# Altium PCB 2_RPi.PcbDoc (part 1 of 2)
Units mm, origin at the board's own origin, x right, y up, seen from the top; angles counter-clockwise.
Board outline 85.1 x 56 mm, 4 copper layers (Top Copper, Signal Layer 1, Signal Layer 2, Bottom Copper), stack 1.572 mm thick; 87 components, 122 nets, 420 pads, 307 vias.
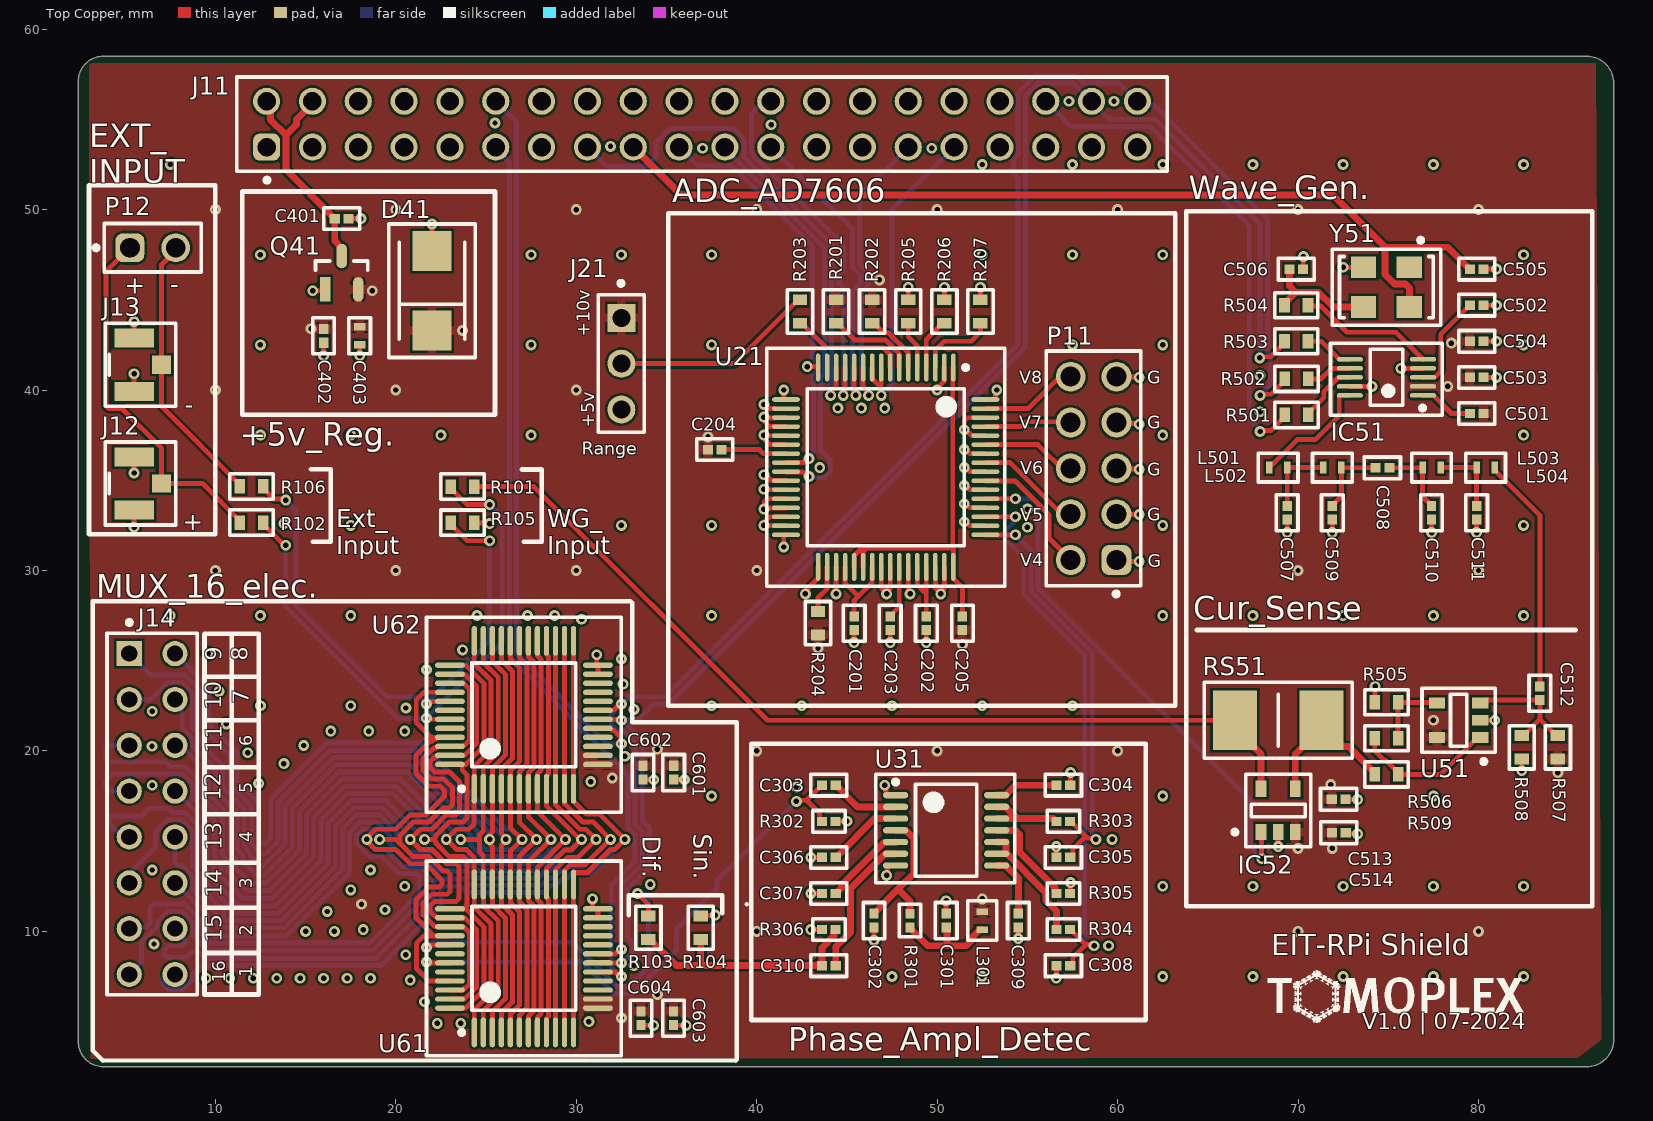
[diagram p0: Top Copper view]
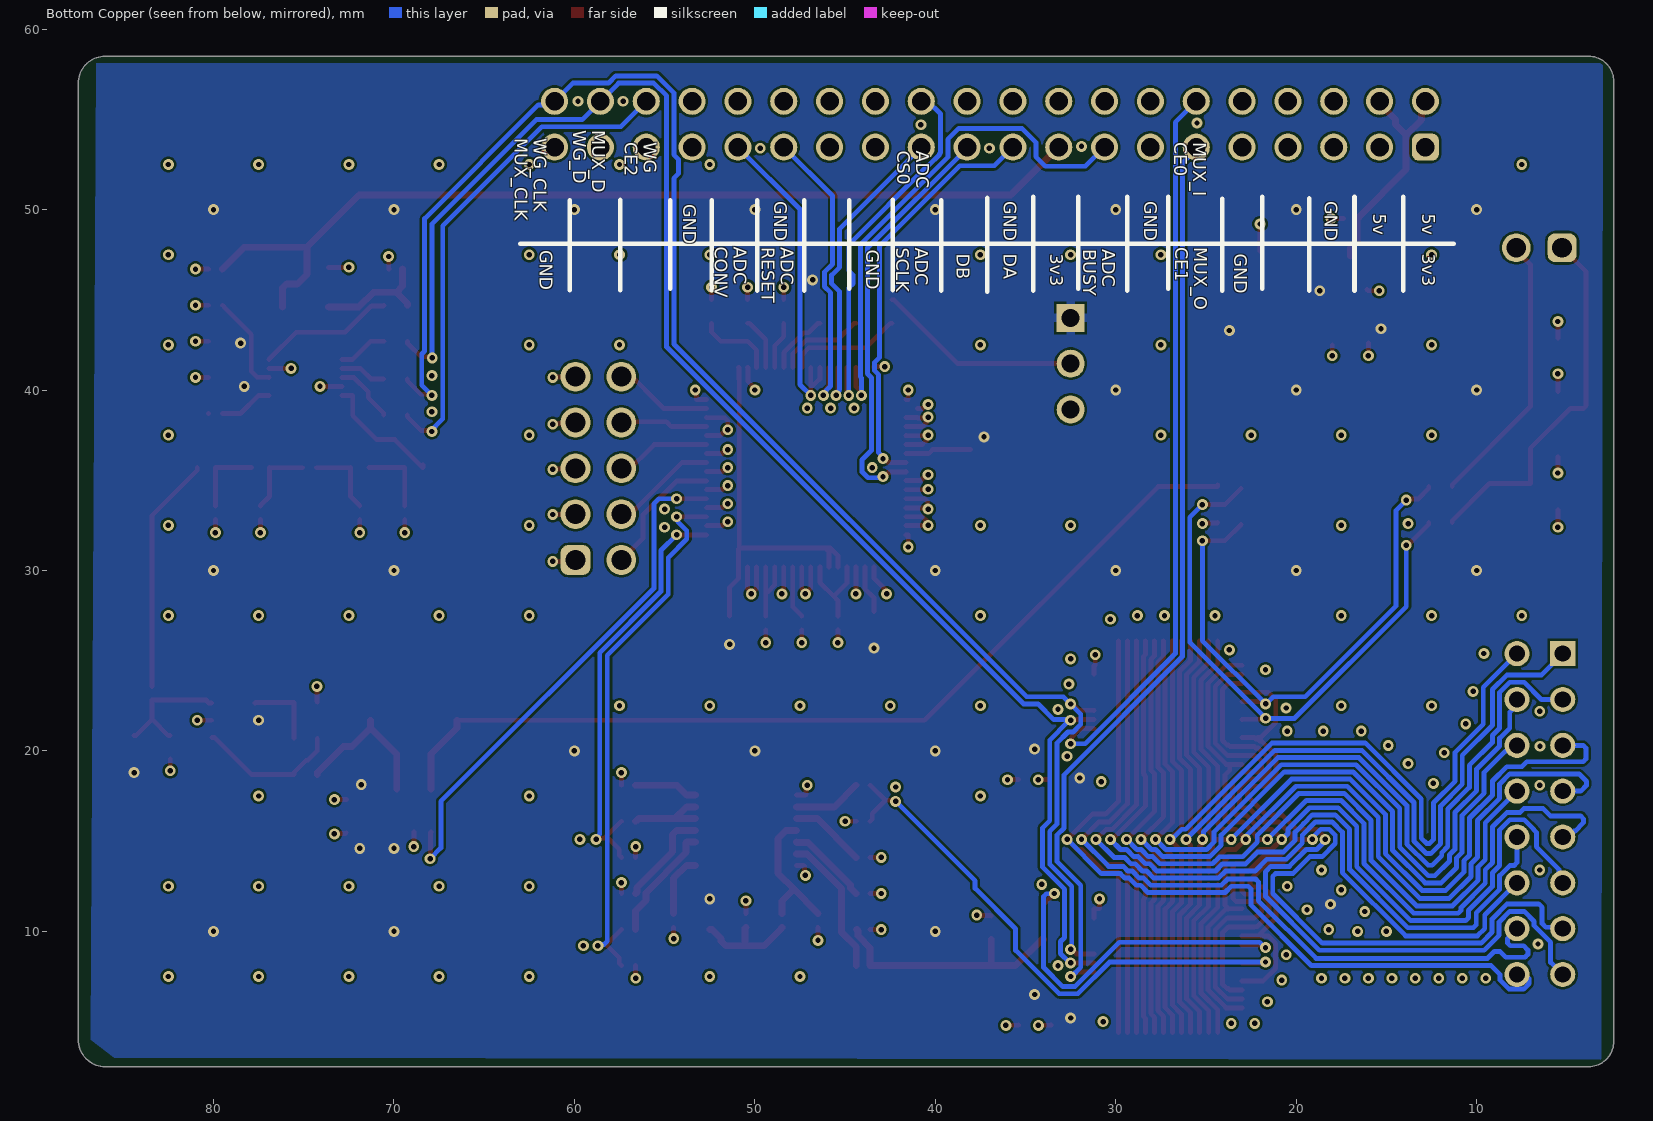
[diagram p1: Bottom Copper view, seen from below]
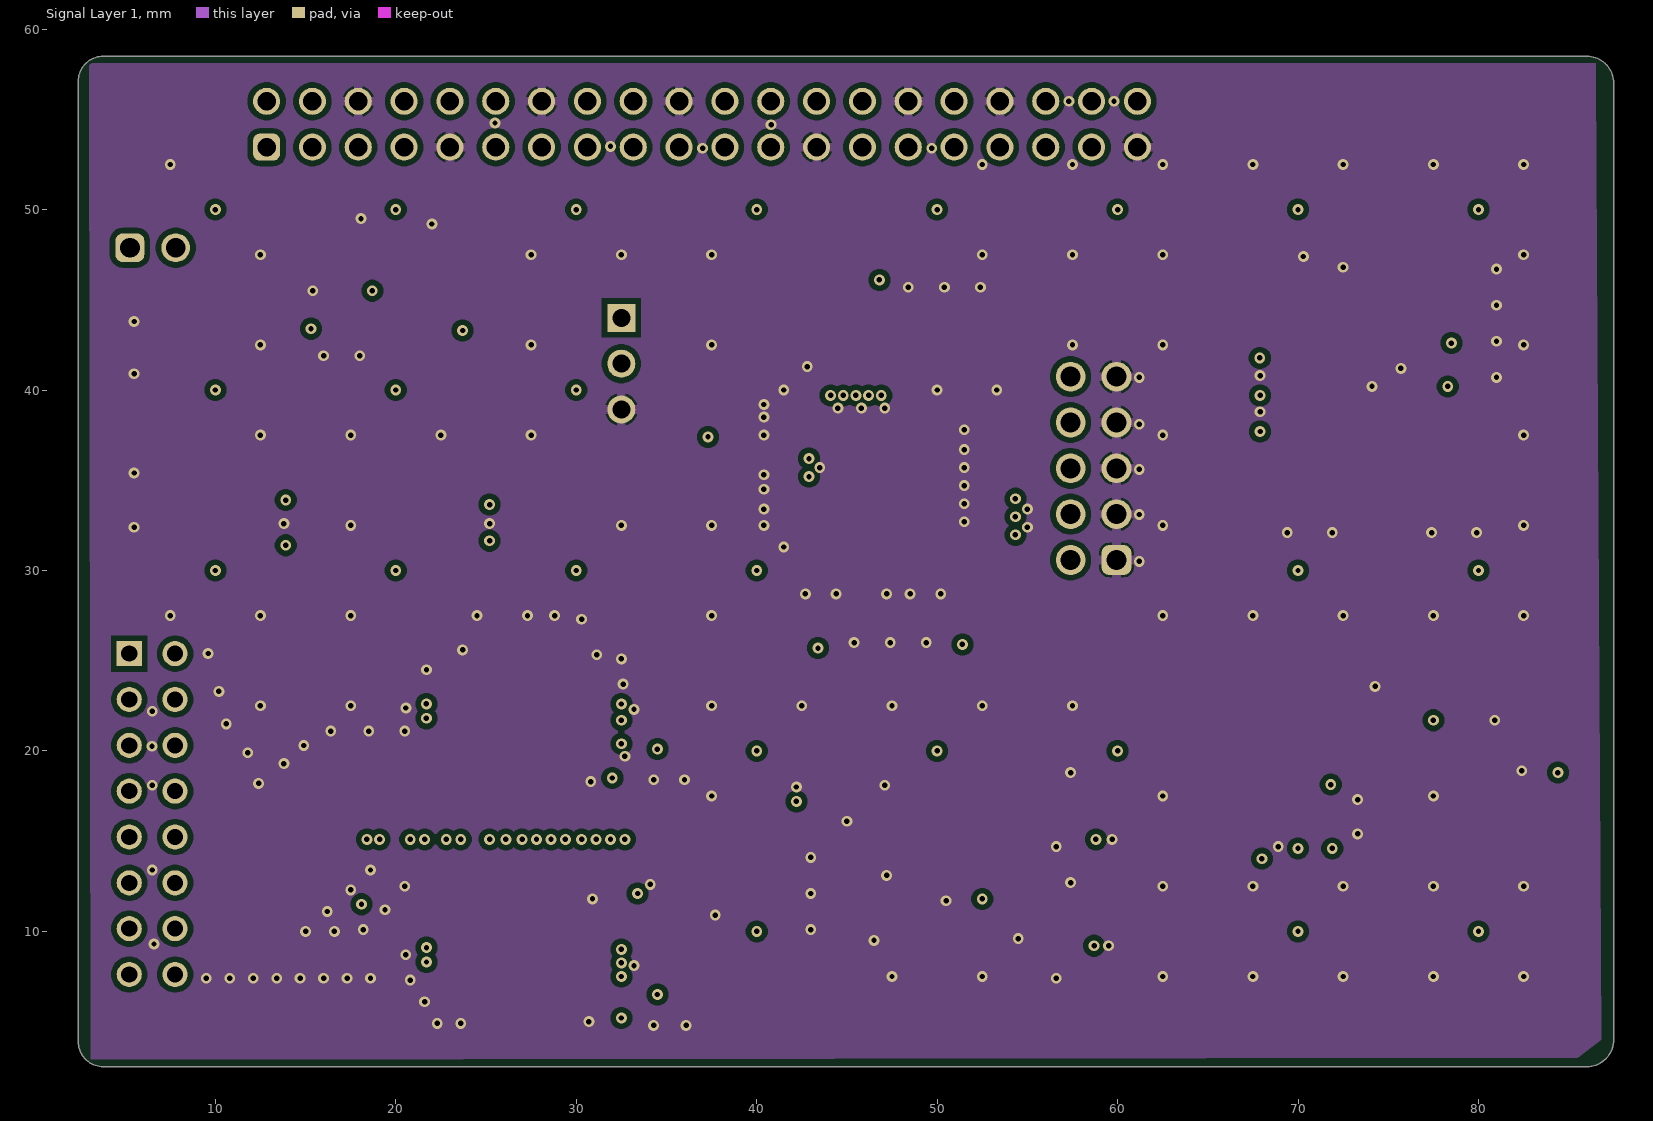
[diagram p2: Signal Layer 1]
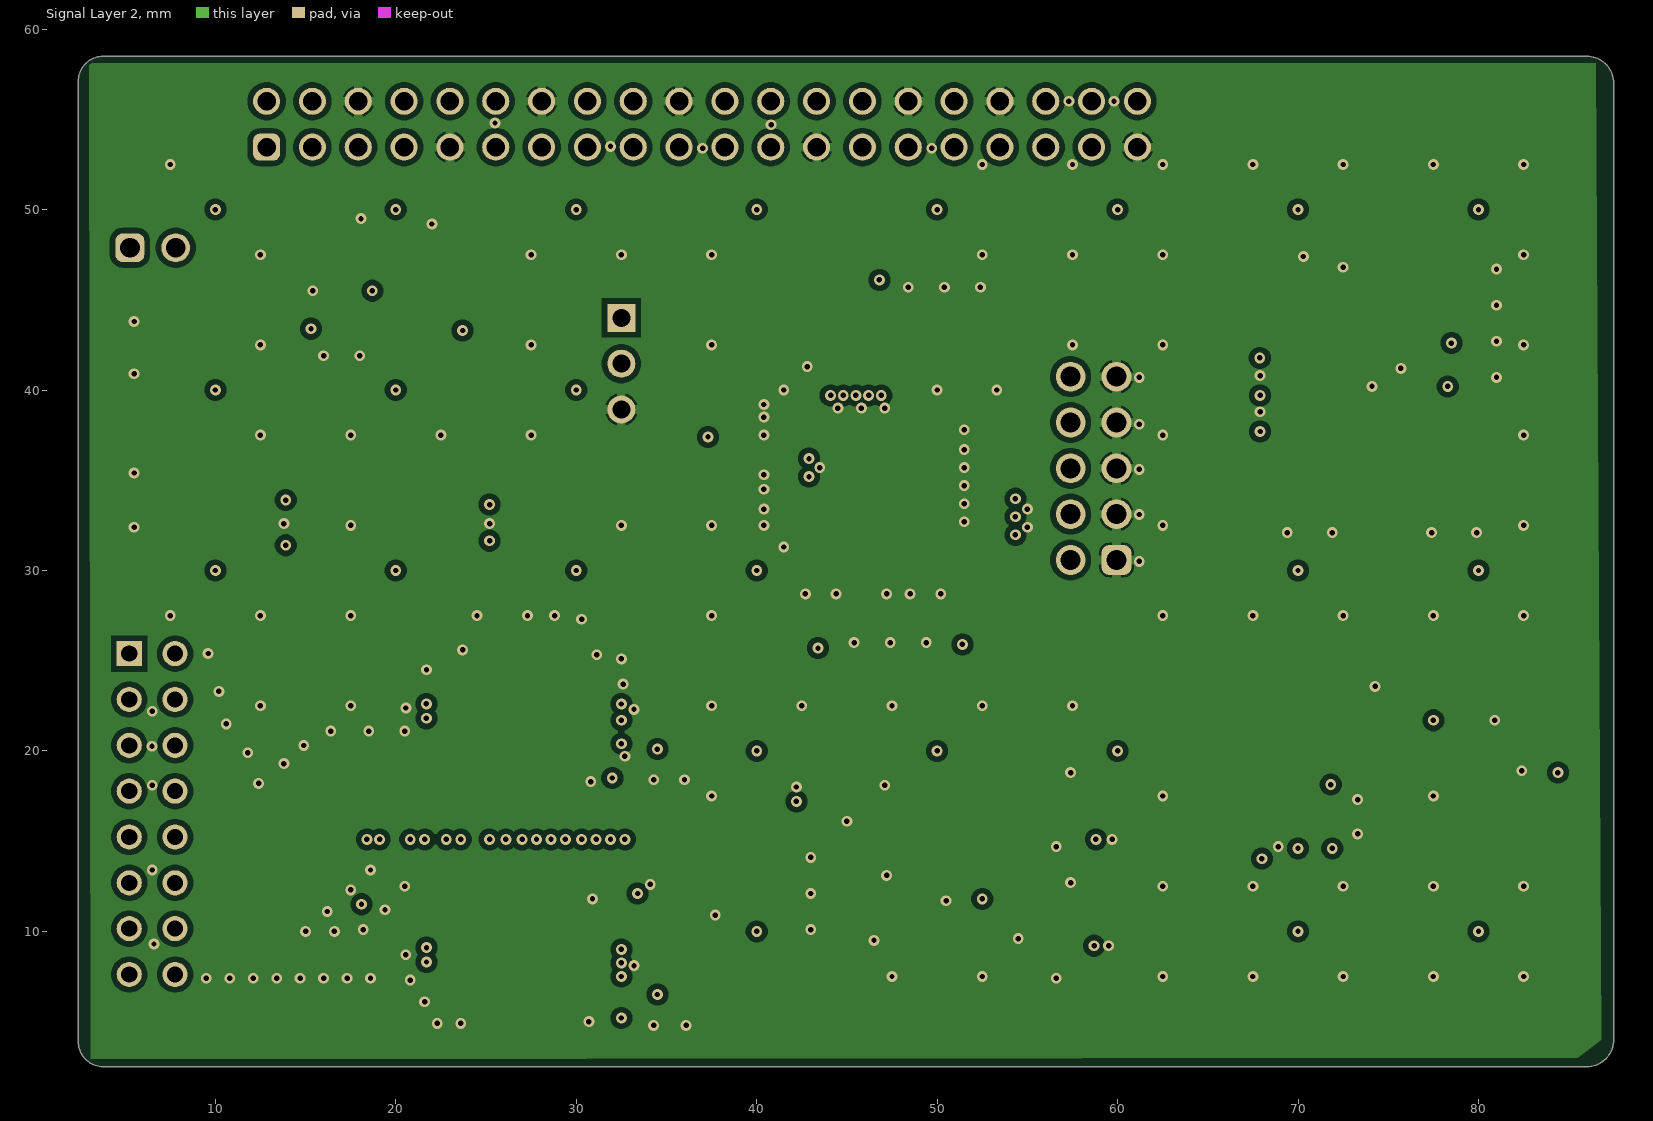
[diagram p3: Signal Layer 2]

## Layer stack, top to bottom
Top Solder: solder mask 0.015, Solder Resist, Dk 3.8
Top Copper: signal copper 0.035
Dielectric 1: prepreg 0.2, 7628, Dk 4.6
Signal Layer 1: signal copper 0.0175
Core: core 1.0668, FR-4, Dk 4.5
Signal Layer 2: signal copper 0.0175
Dielectric 3: prepreg 0.2, 7628, Dk 4.6
Bottom Copper: signal copper 0.035
Bottom Solder: solder mask 0.015, Solder Resist, Dk 3.8

## Board outline
3.8,2.5 cw(c3.8,3.9) 2.4,3.9 2.4,57.1 cw(c3.8,57.1) 3.8,58.5 86,58.5 cw(c86,57) 87.5,57 87.5,4 cw(c86,4) 86,2.5

## Design rules (kind name [scope] priority, off if disabled: settings)
BoardOutlineClearance [All] p1: gap=0.2 ignorepadtopadclearanceinfootprint=FALSE except(0.4: Arc-SplitBarrior Arc-SplitContinuation Track-SplitBarrior Track-SplitContinuation SMDPad-SplitBarrior SMDPad-SplitContinuation THPad-SplitBarrior THPad-SplitContinuation Via-SplitBarrior Via-SplitContinuation Fill-SplitBarrior Fill-SplitContinuation Poly-SplitBarrior Poly-SplitContinuation Region-SplitBarrior Region-SplitContinuation Text-SplitBarrior Text-SplitContinuation)
Clearance "Clearance Bottom Layer" [OnLayer('Bottom Copper')] p1: gap=0.127 ignorepadtopadclearanceinfootprint=TRUE
Clearance "Clearance Signal Layer 2" [OnLayer('Signal Layer 2')] p2: gap=0.3 ignorepadtopadclearanceinfootprint=TRUE
Clearance "Clearance Signal Layer 1" [OnLayer('Signal Layer 1')] p3: gap=0.3 ignorepadtopadclearanceinfootprint=TRUE
Clearance "Clearance Top Layer_1" [OnLayer('Top Copper')] p4: gap=0.127 ignorepadtopadclearanceinfootprint=TRUE
HoleSize [All] p1: absolutevalues=TRUE maxlimit=6.3 minlimit=0.2 maxpercent=80.000 minpercent=20.000
MatchedLengths [InNetClass('Electrodes')] p1: tolerance=2 checknetsindiffpair=FALSE checkdiffpairvsdiffpair=TRUE checkxsignals=TRUE checkothers=TRUE
MinimumAnnularRing [All] p1: minimumring=0.076
MinimumSolderMaskSliver [All] p1: minsoldermaskwidth=0.1
PolygonConnect PolygonConnect_1 [All] p1: thpad.connectstyle=Relief thpad.reliefconductorwidth=0.508 thpad.reliefentries=4 thpad.polygonreliefangle="90 Angle" thpad.airgapwidth=0.127 smdpad.connectstyle=Relief smdpad.reliefconductorwidth=0.508 smdpad.reliefentries=4 smdpad.polygonreliefangle="90 Angle" smdpad.airgapwidth=0.127 via.connectstyle=Direct via.reliefconductorwidth=0.508 via.reliefentries=4 via.polygonreliefangle="90 Angle" via.airgapwidth=0.254
RoutingCorners [All] p1: cornerstyle=Round minsetback=2.54 maxsetback=2.54
RoutingVias [All] p1: holewidth=0.5 width=1 viastyle="Through Hole" minholewidth=0.2 minwidth=0.45 maxholewidth=1 maxwidth=2
SilkToSilkClearance [All] p1: silktosilkclearance=0.1
SilkToSolderMaskClearance [IsPad] p1: minsilkscreentomaskgap=0.1 clearancetoexposedcopper=TRUE
SolderMaskExpansion [All] p1: expansion=0.05 istentingtop=FALSE
SupplyNets "Schematic Supply Nets_5" [InNet('GND')] p1: voltage=0.000
SupplyNets "Schematic Supply Nets_4" [InNet('VDD')] p2: voltage=0.000
SupplyNets "Schematic Supply Nets_1" [InNet('5V')] p3: voltage=0.000
SupplyNets "Schematic Supply Nets" [InNet('3V3')] p4: voltage=0.000
Width [All] p1: maxlimit=2.54 minlimit=0.089 preferedwidth=0.381
25 further rules are at their usual default settings.

## Classes and differential pairs
net class Electrodes: S1 S2 S3 S4 S5 S6 S7 S8 S9 S10 S11 S12 S13 S14 S15 S16
component class U_6_MUX: C601 C602 C603 C604 U61 U62
component class U_5_WG: C501 C502 C503 C504 C505 C506 C507 C508 C509 C510 C511 C512 C513 C514 IC51 IC52 L501 L502 L503 L504 R501 R502 R503 R504 R505 R506 R507 R508 R509 RS51 U51 Y51
component class U_4_Supply: C401 C402 C403 D41 IC41 Q41
component class U_3_Phase_Amp: C301 C302 C303 C304 C305 C306 C307 C308 C309 C310 L301 R301 R302 R303 R304 R305 R306 U31
component class U_2_ADC: C101 C102 C103 C104 C105 C201 C202 C203 C204 C205 J21 R201 R202 R203 R204 R205 R206 R207 U21
component class 1_RPi: J11 J12 J13 J14 P11 P12 R101 R102 R103 R104 R105 R106 U-FL21 U-FL22

## Components (designator, comment, footprint, x,y, rotation, side; value= is the part's Value field where it differs from the comment)
C201 "generic" CAPC1005X55X30LL05T10 45.4,27.08 r90 top value=1uF
C202 "generic" CAPC1005X55X30LL05T10 49.4,27.08 r90 top value=10uF
C203 "generic" CAPC1005X55X30LL05T10 47.4,27.08 r90 top value=10uF
C204 "generic" CAPC1005X55X30LL05T10 37.68,36.7 r180 top value=100nF
C205 "generic" CAPC1005X55X30LL05T10 51.4,27.08 r270 top value=100nF
C301 "generic" CAPC1005X55X30LL05T10 50.5,10.6 r270 top value=100nF
C302 "generic" CAPC1005X55X30LL05T10 46.5,10.6 r90 top value=100pF
C303 "generic" CAPC1005X55X30LL05T10 44,18.1 r0 top value=1nF
C304 "generic" CAPC1005X55X30LL05T10 57,18.1 r180 top value=1uF
C305 "generic" CAPC1005X55X30LL05T10 57,14.1 r0 top value=1uF
C306 "generic" CAPC1005X55X30LL05T10 44,14.1 r180 top value=1nF
C307 "generic" CAPC1005X55X30LL05T10 44,12.1 r180 top value=1nF
C308 "generic" CAPC1005X55X30LL05T10 57,8.1 r0 top value=1uF
C309 "generic" CAPC1005X55X30LL05T10 54.5,10.6 r90 top value=1uF
C310 "generic" CAPC1005X55X30LL05T10 44,8.1 r180 top value=1nF
C401 "generic" CAPC1005X55X30LL05T10 17,49.5 r0 top value=100nF
C402 "generic" CAPC1005X55X30LL05T10 16,43 r270 top value=1uF
C403 "TACK106M002QTA" CAPC1005X70X10LL20T00 18,43 r90 top value=10uF
C501 "generic" CAPC1005X55X30LL05T10 79.9,38.7 r180 top value=10nF
C502 "generic" CAPC1005X55X30LL05T10 79.9,44.7 r180 top value=100nF
C503 "generic" CAPC1005X55X30LL05T10 79.9,40.7 r180 top value=10uF
C504 "generic" CAPC1005X55X30LL05T10 79.9,42.7 r180 top value=100nF
C505 "generic" CAPC1005X55X30LL05T10 79.9,46.7 r180 top value=100nF
C506 "generic" CAPC1005X55X30LL05T10 69.9,46.7 r180 top value=15pF
C507 "generic" CAPC1005X55X30LL05T10 69.4,33.2 r270 top value=330pF
C508 "generic" CAPC1005X55X30LL05T10 74.681,35.691 r180 top value=1.5uF
C509 "generic" CAPC1005X55X30LL05T10 71.9,33.2 r270 top value=270pF
C510 "generic" CAPC1005X55X30LL05T10 77.4,33.2 r90 top value=270pF
C511 "generic" CAPC1005X55X30LL05T10 79.9,33.2 r270 top value=330pF
C512 "generic" CAPC1005X55X30LL05T10 83.4,23.2 r90 top value=2.2uF
C513 "generic" CAPC1005X55X30LL05T10 72.248,17.322 r0 top value=100nF
C514 "generic" CAPC1005X55X30LL05T10 72.265,15.465 r0 top value=1uF
C601 "generic" CAPC1005X55X30LL05T10 35.4,18.8 r270 top value=100nF
C602 "generic" CAPC1005X55X30LL05T10 33.7,18.8 r90 top value=10uF
C603 "generic" CAPC1005X55X30LL05T10 35.39,5.19 r270 top value=100nF
C604 "generic" CAPC1005X55X30LL05T10 33.59,5.19 r90 top value=10uF
D41 "SMBJ6.0A-13-F" SMBJ12A 22,45.5 r90 top
IC51 "AD9833WBRMZ-REEL" ADI-RM-10_L 74.9,40.7 r180 top
IC52 "MAX4376TAUK+T" MAXM-U5+2_L 68.9,16.7 r90 top
J11 "61304021821" 61304021821 36.97,54.73 r0 top
J12 "U.FL-R-SMT(10)" FP-U_FL-R-SMT_10-MFG 5.499,34.818 r270 top
J13 "U.FL-R-SMT(10)" FP-U_FL-R-SMT_10-MFG 5.5,41.4 r270 top
J14 "87227-8" FP-87227-8-MFG 6.5,16.5 r270 top
J21 "90120-0763" FP-90120-0763-MFG 32.5,41.46 r270 top
L301 "LQW18AN10NG00D" IND_0402HL-821XJRU 52.5,10.6 r90 top
L501 "LQW18AN10NG00D" IND_0402HL-821XJRU 68.9,35.7 r180 top
L502 "LQW18AN10NG00D" IND_0402HL-821XJRU 71.9,35.7 r0 top
L503 "LQW18AN10NG00D" IND_0402HL-821XJRU 77.4,35.7 r0 top
L504 "LQW18AN10NG00D" IND_0402HL-821XJRU 80.4,35.7 r0 top
P11 "61301021121" 61301021121 58.67,35.66 r90 top
P12 "61300211121" 61300211121 6.533,47.885 r0 top
Q41 "DMG2305UX-7" FP-SOT23-IPC_B 17,46.5 r90 top
R101 "RC0603JR-070RL" RESC1608X55X25LL10T15 23.7,34.65 r180 top
R102 "RC0603JR-070RL" RESC1608X55X25LL10T15 12.005,32.656 r0 top
R103 "RC0603JR-070RL" RESC1608X55X25LL10T15 34,10.2 r270 top
R104 "RC0603JR-070RL" RESC1608X55X25LL10T15 36.9,10.2 r90 top
R105 "RC0603JR-070RL" RESC1608X55X25LL10T15 23.7,32.65 r180 top
R106 "RC0603JR-070RL" RESC1608X55X25LL10T15 12.005,34.656 r0 top
R201 "RC0603JR-070RL" RESC1608X55X25LL10T15 44.4,44.35 r90 top
R202 "RC0603JR-070RL" RESC1608X55X25LL10T15 46.4,44.35 r90 top
R203 "RC0603JR-070RL" RESC1608X55X25LL10T15 42.4,44.35 r90 top
R204 "RC0603JR-070RL" RESC1608X55X25LL10T15 43.4,27.08 r90 top
R205 "RC0603JR-070RL" RESC1608X55X25LL10T15 48.4,44.35 r90 top
R206 "RC0603JR-070RL" RESC1608X55X25LL10T15 50.4,44.35 r90 top
R207 "RC0603JR-070RL" RESC1608X55X25LL10T15 52.4,44.35 r90 top
R301 "0" RESC1005X40X25LL10T10 48.5,10.6 r270 top
R302 "52.3" RESC1005X40X25LL10T10 44,16.1 r180 top
R303 "100" RESC1005X40X25LL10T10 57,16.1 r0 top
R304 "100" RESC1005X40X25LL10T10 57,10.1 r0 top
R305 "1K" RESC1005X40X25LL10T10 57,12.1 r180 top
R306 "52.3" RESC1005X40X25LL10T10 44,10.1 r180 top
R501 "RC0603JR-070RL" RESC1608X55X25LL10T15 69.917,38.618 r0 top
R502 "RC0603JR-070RL" RESC1608X55X25LL10T15 69.917,40.618 r0 top
R503 "RC0603JR-070RL" RESC1608X55X25LL10T15 69.9,42.7 r0 top
R504 "RC0603JR-070RL" RESC1608X55X25LL10T15 69.9,44.7 r0 top
R505 "RC0603JR-070RL" RESC1608X55X25LL10T15 74.9,22.7 r0 top
R506 "RC0603JR-070RL" RESC1608X55X25LL10T15 74.9,20.7 r180 top
R507 "RC0603JR-070RL" RESC1608X55X25LL10T15 84.4,20.2 r270 top
R508 "RC0603JR-070RL" RESC1608X55X25LL10T15 82.4,20.2 r90 top
R509 "RC0603JR-070RL" RESC1608X55X25LL10T15 74.9,18.7 r180 top
RS51 "10" RESC6331X80N 68.9,21.7 r180 top
U21 "AD7606BSTZ" ST-64-2_L 47.15,35.725 r270 top
U31 "AD8302ARUZ" ADI-RU-14_L 50.5,15.6 r0 top
U51 "AD8014ARTZ" ADI-RJ-5_L 78.9,21.7 r180 top
U61 "ADG725BSUZ" ADI-SU-48_N 27.1,8.5 r90 top
U62 "ADG725BSUZ" ADI-SU-48_N 27.1,22 r90 top
Y51 "ASFLMB-25.000MHZ-XY-T" FP-ASFL3-MFG 74.9,45.7 r180 top

## Footprints (in the part's own frame and the unit in brackets; to place one, negate y for a bottom-side part, rotate by r counter-clockwise, add the part's x,y. Pads: shape width x height; smd on the part's side, far side on the other; paste and mask are expansions set on the pad)
61300211121 [mm] "Pin Header, pitch 2.54 mm, THT, Vertical, single row, 2p"
  rrect50% 1.6x1.6 hole 1.1: 1(-1.27,0)
  round 1.6 hole 1.1: 2(1.27,0)
  silkscreen extent -3.26,-1.35 2.69,1.35, body extent -2.54,-1.27 2.54,1.27, height 8.57
61301021121 [mm] "Pin Header, pitch 2.54 mm, THT, Vertical, dual row, 10p"
  rrect50% 1.65x1.65 hole 1.1: 1(-5.08,-1.27)
  round 1.65 hole 1.1: 2(-5.08,1.27) 3(-2.54,-1.27) 4(-2.54,1.27) 5(0,-1.27) 6(0,1.27) 7(2.54,-1.27) 8(2.54,1.27) 9(5.08,-1.27) 10(5.08,1.27)
  silkscreen extent -7.08,-2.62 6.5,2.62, body extent -6.35,-2.54 6.35,2.54, height 8.59
61304021821 [mm] "Socket Header, Pitch 2.54 mm, THT, Vertical, dual row, 40p"
  rrect50% 1.5x1.5 hole 1.02: 1(-24.13,-1.27)
  round 1.5 hole 1.02: 2(-24.13,1.27) 3(-21.59,-1.27) 4(-21.59,1.27) 5(-19.05,-1.27) 6(-19.05,1.27) 7(-16.51,-1.27) 8(-16.51,1.27) 9(-13.97,-1.27) 10(-13.97,1.27) 11(-11.43,-1.27) 12(-11.43,1.27) 13(-8.89,-1.27) 14(-8.89,1.27) 15(-6.35,-1.27) 16(-6.35,1.27) 17(-3.81,-1.27) 18(-3.81,1.27) 19(-1.27,-1.27) 20(-1.27,1.27) 21(1.27,-1.27) 22(1.27,1.27) 23(3.81,-1.27) 24(3.81,1.27) 25(6.35,-1.27) 26(6.35,1.27) 27(8.89,-1.27) 28(8.89,1.27) 29(11.43,-1.27) 30(11.43,1.27) 31(13.97,-1.27) 32(13.97,1.27) 33(16.51,-1.27) 34(16.51,1.27) 35(19.05,-1.27) 36(19.05,1.27) 37(21.59,-1.27) 38(21.59,1.27) 39(24.13,-1.27) 40(24.13,1.27)
  silkscreen extent -25.78,-3.22 25.78,2.62, body extent -25.65,-2.54 25.65,2.54, height 8.45
ADI-RJ-5_L [mm] "SOT-23, 5-Leads, Body 2.9x1.6mm, Pitch 0.95mm, IPC High Density"
  rect 0.9x0.6 smd: 1(-1.2,0.95) 2(-1.2,0) 3(-1.2,-0.95) 4(1.2,-0.95) 5(1.2,0.95)
  silkscreen extent -2.03,-1.78 2.03,2.41, body extent -0.85,-1.5 0.85,1.5, height 1.45
ADI-RM-10_L [mm] "TSSOP, 10-Leads, Body 3x3mm, Pitch 0.5mm, IPC High Density"
  oval 1.45x0.25 smd: 1(-2.025,1) 2(-2.025,0.5) 3(-2.025,0) 4(-2.025,-0.5) 5(-2.025,-1) 6(2.025,-1) 7(2.025,-0.5) 8(2.025,0) 9(2.025,0.5) 10(2.025,1)
  silkscreen extent -3.1,-1.9 3.1,2.1, body extent -1.55,-1.55 1.55,1.55, height 1.1
ADI-RU-14_L [mm] "TSOP, 14-Leads, Body 5x4.4mm, Pitch 0.65mm, IPC High Density"
  oval 1.4x0.35 smd: 1(-2.8,1.95) 2(-2.8,1.3) 3(-2.8,0.65) 4(-2.8,0) 5(-2.8,-0.65) 6(-2.8,-1.3) 7(-2.8,-1.95) 8(2.8,-1.95) 9(2.8,-1.3) 10(2.8,-0.65) 11(2.8,0) 12(2.8,0.65) 13(2.8,1.3) 14(2.8,1.95)
  silkscreen extent -3.9,-2.9 3.8,3.1, body extent -2.25,-2.55 2.25,2.55, height 1.2
ADI-SU-48_N [mm] "QFP, 48-Leads, Body 7x7mm, Pitch 0.5mm, IPC Medium Density"
  oval 1.65x0.3 smd: 1(-4.1,2.75) 2(-4.1,2.25) 3(-4.1,1.75) 4(-4.1,1.25) 5(-4.1,0.75) 6(-4.1,0.25) 7(-4.1,-0.25) 8(-4.1,-0.75) 9(-4.1,-1.25) 10(-4.1,-1.75) 11(-4.1,-2.25) 12(-4.1,-2.75) 25(4.1,-2.75) 26(4.1,-2.25) 27(4.1,-1.75) 28(4.1,-1.25) 29(4.1,-0.75) 30(4.1,-0.25) 31(4.1,0.25) 32(4.1,0.75) 33(4.1,1.25) 34(4.1,1.75) 35(4.1,2.25) 36(4.1,2.75)
  oval 0.3x1.65 smd: 13(-2.75,-4.1) 14(-2.25,-4.1) 15(-1.75,-4.1) 16(-1.25,-4.1) 17(-0.75,-4.1) 18(-0.25,-4.1) 19(0.25,-4.1) 20(0.75,-4.1) 21(1.25,-4.1) 22(1.75,-4.1) 23(2.25,-4.1) 24(2.75,-4.1) 37(2.75,4.1) 38(2.25,4.1) 39(1.75,4.1) 40(1.25,4.1) 41(0.75,4.1) 42(0.25,4.1) 43(-0.25,4.1) 44(-0.75,4.1) 45(-1.25,4.1) 46(-1.75,4.1) 47(-2.25,4.1) 48(-2.75,4.1)
  silkscreen extent -5.4,-5.4 5.4,5.4, body extent -3.5,-3.5 3.5,3.5, height 1.2
CAPC1005X55X30LL05T10 [mm] "Chip Capacitor, 2-Leads, Body 1.00x0.50mm, IPC High Density"
  rect 0.56x0.52 smd: 1(-0.38,0) 2(0.38,0)
  silkscreen extent -1,-0.6 1,0.6, body extent -0.53,-0.28 0.53,0.28, height 0.55
CAPC1005X70X10LL20T00 [mm] "Chip Capacitor, 2-Leads, Body 1.00x0.50mm, IPC High Density"
  rect 0.42x0.62 smd: 1(-0.5,0) 2(0.5,0)
  silkscreen extent -1,-0.6 1,0.6, body extent -0.6,-0.35 0.6,0.35, height 0.7
FP-87227-8-MFG [mil]
  rect 54.69x54.69 hole 35 paste-99999 mask+0: 1(-350,-50)
  round 54.69 hole 35 paste-99999 mask+0: 2(-350,50) 3(-250,-50) 4(-250,50) 5(-150,-50) 6(-150,50) 7(-50,-50) 8(-50,50) 9(50,-50) 10(50,50) 11(150,-50) 12(150,50) 13(250,-50) 14(250,50) 15(350,-50) 16(350,50)
  silkscreen extent -423,-99 394,99, body extent -398,-102 398,102, height 10
FP-90120-0763-MFG [mm]
  rect 1.55x1.55 hole 1 paste-2539.97 mask+0: 1(-2.54,0)
  round 1.55 hole 1 paste-2539.97 mask+0: 2(0,0) 3(2.54,0)
  silkscreen extent -4.57,-1.27 3.81,1.27, body extent -3.91,-1.37 3.91,1.37, height 0.25
FP-ASFL3-MFG [mm]
  rect 1.4x1.2 smd paste+0 mask+0: 1(-1.27,-1.1) 2(1.27,-1.1) 3(1.27,1.1) 4(-1.27,1.1)
  silkscreen extent -3,-2.72 3,2.1, body extent -2.7,-1.8 2.7,1.8, height 0.25
FP-SOT23-IPC_B [mm]
  rect 1.359x0.587 smd paste+0 mask+0: 1(-0.927,0.915)
  rrect100% 1.359x0.587 smd paste+0 mask+0: 2(-0.927,-0.915) 3(0.927,0)
  silkscreen extent 0.13,-1.45 0.65,1.45, body extent -1.86,-1.7 1.86,1.7, height 0.25
FP-U_FL-R-SMT_10-MFG [mm]
  rect 1x1.05 smd paste-1000 mask+0: 1(0,1.525)
  rect 1.05x2.2 smd paste-1000 mask+0: 2(-1.475,0) 3(1.475,0)
  silkscreen extent -2.3,-1.6 2.3,2.3, body extent -2.1,-1.48 2.1,2.15, height 0.25
IND_0402HL-821XJRU [mm]
  rect 0.36x0.66 smd: 1(-0.5,0) 2(0.5,0)
  silkscreen extent -1.1,-0.8 1.1,0.8, body extent -0.61,-0.39 0.61,0.39, height 0.57
MAXM-U5+2_L [mm] "SOT23, 5-Leads, Body 2.9x1.625mm, Pitch 0.95mm, IPC High Density"
  rect 0.9x0.6 smd: 1(-1.2,0.95) 2(-1.2,0) 3(-1.2,-0.95) 4(1.2,-0.95) 5(1.2,0.95)
  silkscreen extent -2,-1.8 2,2.52, body extent -0.87,-1.5 0.87,1.5, height 1.45
RESC1005X40X25LL10T10 [mm] "Chip Resistor, 2-Leads, Body 1.00x0.50mm, IPC High Density"
  rect 0.55x0.5 smd: 1(-0.375,0) 2(0.375,0)
  silkscreen extent -0.9,-0.6 0.9,0.6, body extent -0.55,-0.3 0.55,0.3, height 0.4
RESC1608X55X25LL10T15 [mm] "Chip Resistor, 2-Leads, Body 1.60x0.80mm, IPC High Density"
  rect 0.6x0.8 smd: 1(-0.65,0) 2(0.65,0)
  silkscreen extent -1.2,-0.7 1.2,0.7, body extent -0.85,-0.45 0.85,0.45, height 0.55
RESC6331X80N [mm]
  rect 2.45x3.3 smd: 1(-2.4,0) 2(2.4,0)
  silkscreen extent -4.1,-2.1 4.1,2.1, body extent -3.15,-1.55 3.15,1.55, height 0.8
SMBJ12A [mm]
  rect 2.2x2.15 smd: 1(-2.2,0) 2(2.2,0)
  silkscreen extent -3.7,-2.4 3.7,2.4, body extent -2.68,-1.86 2.68,1.86, height 2.33
ST-64-2_L [mm] "Thin QFP, 64-Leads, Body 10x10mm, Pitch 0.5mm, IPC High Density"
  oval 1.55x0.25 smd: 1(-5.525,3.75) 2(-5.525,3.25) 3(-5.525,2.75) 4(-5.525,2.25) 5(-5.525,1.75) 6(-5.525,1.25) 7(-5.525,0.75) 8(-5.525,0.25) 9(-5.525,-0.25) 10(-5.525,-0.75) 11(-5.525,-1.25) 12(-5.525,-1.75) 13(-5.525,-2.25) 14(-5.525,-2.75) 15(-5.525,-3.25) 16(-5.525,-3.75) 33(5.525,-3.75) 34(5.525,-3.25) 35(5.525,-2.75) 36(5.525,-2.25) 37(5.525,-1.75) 38(5.525,-1.25) 39(5.525,-0.75) 40(5.525,-0.25) 41(5.525,0.25) 42(5.525,0.75) 43(5.525,1.25) 44(5.525,1.75) 45(5.525,2.25) 46(5.525,2.75) 47(5.525,3.25) 48(5.525,3.75)
  oval 0.25x1.55 smd: 17(-3.75,-5.525) 18(-3.25,-5.525) 19(-2.75,-5.525) 20(-2.25,-5.525) 21(-1.75,-5.525) 22(-1.25,-5.525) 23(-0.75,-5.525) 24(-0.25,-5.525) 25(0.25,-5.525) 26(0.75,-5.525) 27(1.25,-5.525) 28(1.75,-5.525) 29(2.25,-5.525) 30(2.75,-5.525) 31(3.25,-5.525) 32(3.75,-5.525) 49(3.75,5.525) 50(3.25,5.525) 51(2.75,5.525) 52(2.25,5.525) 53(1.75,5.525) 54(1.25,5.525) 55(0.75,5.525) 56(0.25,5.525) 57(-0.25,5.525) 58(-0.75,5.525) 59(-1.25,5.525) 60(-1.75,5.525) 61(-2.25,5.525) 62(-2.75,5.525) 63(-3.25,5.525) 64(-3.75,5.525)
  silkscreen extent -6.6,-6.6 6.6,6.6, body extent -5,-5 5,5, height 1.6

## Part data
C201 C202 C203 C204 C205 C301 C302 C303 C304 C305 C306 C307 C308 C309 C310 C401 C402 C501 C502 C503 C504 C505 C506 C507 C508 C509 C510 C511 C512 C513 C514 C601 C602 C603 C604: library part Capacitor, Device Class L1="Passive Components", Device Class L2=Capacitors
C403: library part CAP, Manufacturer="AVX Interconnect / Elco", Part Number=TACK106M002QTA
D41: "TVS Diode (Uni-directional)", Manufacturer_Name="Diodes Incorporated", Mouser Part Number=621-SMBJ6.0A-13-F, Arrow Part Number=SMBJ6.0A-13-F, Arrow Price/Stock=https://www.arrow.com/en/products/smbj6.0a-13-f/diodes-incorporated?region=nac, Datasheet Link=https://www.mouser.com/datasheet/2/115/ds19002-1078141.pdf, Height=2.5mm, Manufacturer_Part_Number=SMBJ6.0A-13-F, Mouser Price/Stock=https://www.mouser.co.uk/ProductDetail/Diodes-Incorporated/SMBJ60A-13-F?qs=gaDBXWSqsDAIOdP0T6ZIBg%3D%3D
IC51: "Integrated Circuit", Manufacturer_Name="Analog Devices", Mouser Part Number=584-AD9833WBRMZ-REEL, Arrow Part Number=AD9833WBRMZ-REEL, Arrow Price/Stock=https://www.arrow.com/en/products/ad9833wbrmz-reel/analog-devices?region=nac, Datasheet Link=https://componentsearchengine.com/Datasheets/1/AD9833WBRMZ-REEL.pdf, Height=1.1mm, Manufacturer_Part_Number=AD9833WBRMZ-REEL, Mouser Price/Stock=https://www.mouser.co.uk/ProductDetail/Analog-Devices/AD9833WBRMZ-REEL?qs=pqQDoYZ2quYFMaVwD82%2FEg%3D%3D
IC52: "MAX4376 Series 28 V 2MHz Buffer Current Sense Operational Amplifier - SOT-23-5", Case/Package=SOT-23-5, Input Bias Current=800uA, Manufacturer=Maxim, Manufacturer_Name="Analog Devices", Max Operating Temperature=125°C, Max Supply Current=2.2mA, Max Supply Voltage=28V, Min Operating Temperature=-40°C, Min Supply Voltage=3V, Mouser Part Number=700-MAX4376TAUK+T, Operating Supply Current=1mA, Output Current per Channel=2mA, Package Quantity=2500, -3db Bandwidth=2MHz, Bandwidth=1.7MHz, Category="Amplifiers - Op Amps, Buffer, Instrumentation", Common Mode Rejection Ratio=90dB, ComponentLink1Description=https://datasheet.ciiva.com/30481/0900766b8124c2e5-30481549.pdf?src-supplier=Rs, ComponentLink1URL=https://datasheet.ciiva.com/30481/0900766b8124c2e5-30481549.pdf?src-supplier=Rs, ComponentLink2Description=https://datasheet.ciiva.com/1802/max4376-max4378-1802098.pdf?src-supplier=Digi-Key, ComponentLink2URL=https://datasheet.ciiva.com/1802/max4376-max4378-1802098.pdf?src-supplier=Digi-Key, ComponentLink3Description=https://datasheet.ciiva.com/1802/max4376-max4378-1802099.pdf?src-supplier=Digi-Key, ComponentLink3URL=https://datasheet.ciiva.com/1802/max4376-max4378-1802099.pdf?src-supplier=Digi-Key, ComponentLink4Description=https://datasheet.ciiva.com/2976/max4376-max4378-2976259.pdf?src-supplier=Avnet, ComponentLink4URL=https://datasheet.ciiva.com/2976/max4376-max4378-2976259.pdf?src-supplier=Avnet, ComponentLink5Description=https://datasheet.ciiva.com/1802/max4376-max4378-1802100.pdf?src-supplier=Digi-Key, ComponentLink5URL=https://datasheet.ciiva.com/1802/max4376-max4378-1802100.pdf?src-supplier=Digi-Key, Datasheet Link=https://pdfserv.maximintegrated.com/en/ds/MAX4376-MAX4378.pdf, Height=1.45mm, Length=3mm, Manufacturer Part Number=MAX4376TAUK+T, Manufacturer_Part_Number=MAX4376TAUK+T, Mouser Price/Stock=https://www.mouser.co.uk/ProductDetail/Maxim-Integrated/MAX4376TAUK%2bT?qs=1eQvB6Dk1viezN1idOFyfw%3D%3D, Number of Amplifiers=1, Number of Circuits=1, Packaging="Tape and Reel", Pins=5, Pricing="1=2,84, 10=2,55, 50=2,41, 100=2,09, 1000=1,61, 10000=1,55 (USD)", Reach SVHC Compliant=Unknown, RoHS=Yes, RoHS Compliant=Yes, Series=MAX4376T, Slew Rate=10V/µs, Stock=10809, Supplier=Mouser, Supplier 1=Mouser, Supplier Part Number=700-MAX4376TAUK+T, Supplier Part Number 1=700-MAX4376TAUK+T, Weight=0.001058oz, Width=1.75mm
J11: library part CMP-1502-01370-3, Contact Resistance=20mΩ, Current Rating=3A, Operating Supply Voltage=250V, Gender=Female, Lead Pitch=2.54mm, NexarPartId=61924769, Number of Pins=40, Orientation=Vertical, RoHS=Non-Compliant
J12 J13: library part eef6fde44c591823e8076210edfe12f, "CONN U.FL RCPT STR 50 OHM SMD", Case/Package=SMD/SMT, Dielectric Material=Polymer, Frequency=6GHz, Housing Color=Beige, Max Operating Temperature=90°C, Min Operating Temperature=-40°C, Package Quantity=1, Body Material=Bronze, Body Plating=Silver, Connector Type=Coaxial, Contact Material=Brass, Contact Plating=Gold, Depth=3.1mm, Fastening Type=Snap, Impedance=50R, Lead Free="Lead Free", Length=3mm, Max Frequency=6GHz, Mount="Surface Mount", Orientation=Vertical, Packaging="Tape and Reel", Plating=Silver, Radiation Hardening=No, Termination=Solder
J14: library part CMP-03369-000064-1, "CONN HEADER VERT 16POS 2.54MM", Current Rating=3A, Manufacturer="TE Connectivity", Package=0, Temperature="-65°C to +105°C", Temperature Range High=+105°C, Temperature Range Low=-65°C, Automotive=No, Category=Conn, ComponentLink2Description=Datasheet, ComponentLink2URL=https://www.te.com/usa-en/product-87227-8.datasheet.pdf, Conn Gender=Male, Conn Orientation=Straight, Contact Material=Gold,Nickel, Device Class L1=Connectors, Device Class L2="Headers and Wire Housings", Device Class L3=unset, Digikey Description="CONN HEADER VERT 16POS 2.54MM", Footprint Url=https://www.te.com/commerce/DocumentDelivery/DDEController?Action=showdoc&DocId=Customer+Drawing%7F87227%7FH4%7Fpdf%7FEnglish%7FENG_CD_87227_H4.pdf%7F87227-8, Height=0.428inch, Lead Free=Yes, Manufacturer Part Number=87227-8, Mouser Description="Headers & Wire Housings UNSHRD VERT DUAL 16", Number of Contacts=16, Number of Rows=2, Octopart=https://octopart.com/87227-8-te+connectivity-39407754, Pitch=2.54mm, RoHS=TRUE
J21: library part CMP-04776-000084-1, "CONN HEADER VERT 3POS 2.54MM", Current Rating=3A, Manufacturer=Molex, Temperature="-55°C to +125°C", Temperature Range High=+125°C, Temperature Range Low=-55°C, Voltage Rating=350V, Automotive=No, Category=Conn, ComponentLink2Description=Datasheet, ComponentLink2URL=https://www.molex.com/webdocs/datasheets/pdf/en-us/0901200763_PCB_HEADERS.pdf, Conn Gender=Male, Conn Orientation=Vertical, Contact Material=Gold,Nickel, Device Class L1=Connectors, Device Class L2="Headers and Wire Housings", Device Class L3=unset, Digikey Description="CONN HEADER VERT 3POS 2.54MM", Footprint Url=https://www.molex.com/pdm_docs/sd/901200763_sd.pdf, Height=5.8mm, Lead Free=Yes, Manufacturer Part Number=90120-0763, Mouser Description="Board-To-Board Connector, C-Grid III 90120 Series, Through Hole, Header, 3, 2.54 mm", Number of Contacts=3, Number of Rows=1, Octopart=https://octopart.com/90120-0763-molex-655433, Package=90120-0763, Pitch=2.54mm, RoHS=TRUE
L301: library part 725321dda6339637d4d059423bc1c3c, "Wire Wound RF Inductor 10nH ±2% 650mA 0.11Ω 0603 (1608)", Case Code (Imperial)=0603, Case Code (Metric)=1608, Current=550mA, Current Rating=650mA, DC Resistance (DCR)=110mR, Inductance=10uH, Inductance Tolerance=2%, Max Operating Temperature=125°C, Min Operating Temperature=-55°C, Package Quantity=4000, Resistor Type=Wirewound, Self Resonant Frequency=6GHz, Test Frequency=100MHz, Case/Package=0603, DC Current=650mA, Depth=1mm, Height=0.8mm, Lead Free="Lead Free", Length=1.6mm, Max DC Current=650mA, Military Standard=Not, Mount="Surface Mount", Number of Pins=2, Packaging="Tape and Reel", Q Factor=35, Radiation Hardening=No, Rated Current-Max=650mA, REACH SVHC="No SVHC", Series=LQW18A_00, Series Resistance=110mR, Shielding=Unshielded, Termination=SMD/SMT, Tolerance=2%, Weight=0.000106oz, Width=0.8mm
L501 L504: library part 725321dda6339637d4d059423bc1c3c, "Wire Wound RF Inductor 10nH ±2% 650mA 0.11Ω 0603 (1608)", Case Code (Imperial)=0603, Case Code (Metric)=1608, Current=550mA, Current Rating=650mA, DC Resistance (DCR)=110mR, Inductance=330nH, Inductance Tolerance=2%, Max Operating Temperature=125°C, Min Operating Temperature=-55°C, Package Quantity=4000, Resistor Type=Wirewound, Self Resonant Frequency=6GHz, Test Frequency=100MHz, Case/Package=0603, DC Current=650mA, Depth=1mm, Height=0.8mm, Lead Free="Lead Free", Length=1.6mm, Max DC Current=650mA, Military Standard=Not, Mount="Surface Mount", Number of Pins=2, Packaging="Tape and Reel", Q Factor=35, Radiation Hardening=No, Rated Current-Max=650mA, REACH SVHC="No SVHC", Series=LQW18A_00, Series Resistance=110mR, Shielding=Unshielded, Termination=SMD/SMT, Tolerance=2%, Weight=0.000106oz, Width=0.8mm
L502 L503: library part 725321dda6339637d4d059423bc1c3c, "Wire Wound RF Inductor 10nH ±2% 650mA 0.11Ω 0603 (1608)", Case Code (Imperial)=0603, Case Code (Metric)=1608, Current=550mA, Current Rating=650mA, DC Resistance (DCR)=110mR, Inductance=1.2uH, Inductance Tolerance=2%, Max Operating Temperature=125°C, Min Operating Temperature=-55°C, Package Quantity=4000, Resistor Type=Wirewound, Self Resonant Frequency=6GHz, Test Frequency=100MHz, Case/Package=0603, DC Current=650mA, Depth=1mm, Height=0.8mm, Lead Free="Lead Free", Length=1.6mm, Max DC Current=650mA, Military Standard=Not, Mount="Surface Mount", Number of Pins=2, Packaging="Tape and Reel", Q Factor=35, Radiation Hardening=No, Rated Current-Max=650mA, REACH SVHC="No SVHC", Series=LQW18A_00, Series Resistance=110mR, Shielding=Unshielded, Termination=SMD/SMT, Tolerance=2%, Weight=0.000106oz, Width=0.8mm
P11: library part Header_Male_2R_10P, Color=Black, Contact Resistance=20mΩ, Current Rating=3A, Flammability Rating="UL94 V-0", Insulation Resistance=1GΩ, Max Operating Temperature=105°C, Min Operating Temperature=-40°C, Operating Supply Voltage=250V, Connector Type="Male Pin", Contact Gender=Male, Contact Material=Copper, Contact Mating Length=5.9944mm, Contact Plating=Gold, Gender=Male, Height=2.54mm, Housing Material=PBT, Insulation=Insulated, Lead Pitch=2.54mm, Length=12.7mm, Mount="Through Hole", NexarPartId=18818163, Number of Contacts=10, Number of Pins=10, Number of Positions=10, Number of Rows=2, Orientation=Vertical, Packaging=Bulk, Pitch=2.54mm, REACH SVHC=Unknown, RoHS=Compliant, Row Spacing=2.54mm, Termination="Through Hole", Voltage Rating=250V, Width=12.7mm
P12: library part CMP-1712-00002-6, Color=Black, Contact Resistance=20mΩ, Current Rating=3A, Max Operating Temperature=125°C, Min Operating Temperature=-40°C, Operating Supply Voltage=250V, Connector Type="Male Pin", Contact Gender=Male, Contact Material=Copper, Contact Mating Length=5.9944mm, Contact Plating=Gold, Gender=Male, Height=8.94mm, Housing Material=PBT, Lead Free="Lead Free", Lead Pitch=2.54mm, Mount="Through Hole", NexarPartId=20081794, Number of Contacts=2, Number of Pins=2, Number of Positions=2, Number of Rows=1, Orientation=Vertical, Packaging=Bulk, Pitch=2.54mm, REACH SVHC="No SVHC", RoHS=Compliant, Termination="Through Hole", Voltage Rating=250V
Q41: library part CMP-1693-00002-4, "MOSFET P-CH 20V 4.2A SOT23", Case/Package=SOT-23, Continuous Drain Current (ID)=4.2A, Drain to Source Resistance=200mR, Drain to Source Voltage (Vdss)=20V, Gate to Source Voltage (Vgs)=8V, Input Capacitance=808pF, Max Operating Temperature=150°C, Max Power Dissipation=1.4W, Min Operating Temperature=-55°C, On-State Resistance=52MR, Package Quantity=3000, Threshold Voltage=-900mV, Contact Plating=Tin, Element Configuration=Single, Fall Time=34.7ns, Height=1.1mm, Lead Free="Lead Free", Length=3mm, Mount="Surface Mount", Number of Channels=1, Number of Pins=3, Packaging="Tape and Reel", Radiation Hardening=No, Rds On Max=52mR, REACH SVHC="No SVHC", Rise Time=13.7ns, Turn-Off Delay Time=79.3ns, Turn-On Delay Time=10.8ns, Weight=0.000282oz, Width=1.4mm
R101 R102 R103 R104 R105 R106: library part RES-2, "Chip Resistor, 0 Ohm, +/- 5%, 0.1 W, -55 to 155 degC, 0603 (1608 Metric), RoHS, Tape and Reel", Case Code (Imperial)=0603, Case Code (Metric)=1608, Manufacturer=Yageo, Max Operating Temperature=155degC, Min Operating Temperature=-55degC, Package Description="2-Pin Surface Mount Device, Body 1.6 x 0.8 mm", Package Quantity=5000, Power Rating=100mW, Resistance=0, Temperature Coefficient=200ppm/degreesC, Tolerance=5%, Voltage Rating=50V, Case/Package=0603, Composition=ThickFilm, Contact Plating=Tin, Datasheet URL=http://www.yageo.com/NewPortal/yageodocoutput?fileName=/pdf/R-Chip/PYu-RC_Group_51_RoHS_L_5.pdf, Datasheet Version="Rev. 5, 10/2016", Depth=0.8mm, Height=0.45mm, Lead Free=LeadFree, Length=1.6mm, Manufacturer URL=http://www.yageo.com/, Military Standard=Not, Number of Pins=2, Package Reference=0603, Packaging=TapeandReel, Radiation Hardening=No, REACH SVHC=NoSVHC, RoHSCompliant=true, Termination=SMD/SMT, Voltage Rating (DC)=50V, Width=0.8mm
R201 R501 R502 R503 R504 R509: library part RES-2, "Chip Resistor, 0 Ohm, +/- 5%, 0.1 W, -55 to 155 degC, 0603 (1608 Metric), RoHS, Tape and Reel", Case Code (Imperial)=0603, Case Code (Metric)=1608, Manufacturer=Yageo, Max Operating Temperature=155degC, Min Operating Temperature=-55degC, Package Description="2-Pin Surface Mount Device, Body 1.6 x 0.8 mm", Package Quantity=5000, Power Rating=100mW, Resistance=49.9, Temperature Coefficient=200ppm/degreesC, Tolerance=5%, Voltage Rating=50V, Case/Package=0603, Composition=ThickFilm, Contact Plating=Tin, Datasheet URL=http://www.yageo.com/NewPortal/yageodocoutput?fileName=/pdf/R-Chip/PYu-RC_Group_51_RoHS_L_5.pdf, Datasheet Version="Rev. 5, 10/2016", Depth=0.8mm, Height=0.45mm, Lead Free=LeadFree, Length=1.6mm, Manufacturer URL=http://www.yageo.com/, Military Standard=Not, Number of Pins=2, Package Reference=0603, Packaging=TapeandReel, Radiation Hardening=No, REACH SVHC=NoSVHC, RoHSCompliant=true, Termination=SMD/SMT, Voltage Rating (DC)=50V, Width=0.8mm
R202 R203 R204 R205 R206 R207: library part RES-2, "Chip Resistor, 0 Ohm, +/- 5%, 0.1 W, -55 to 155 degC, 0603 (1608 Metric), RoHS, Tape and Reel", Case Code (Imperial)=0603, Case Code (Metric)=1608, Manufacturer=Yageo, Max Operating Temperature=155degC, Min Operating Temperature=-55degC, Package Description="2-Pin Surface Mount Device, Body 1.6 x 0.8 mm", Package Quantity=5000, Power Rating=100mW, Resistance=10K, Temperature Coefficient=200ppm/degreesC, Tolerance=5%, Voltage Rating=50V, Case/Package=0603, Composition=ThickFilm, Contact Plating=Tin, Datasheet URL=http://www.yageo.com/NewPortal/yageodocoutput?fileName=/pdf/R-Chip/PYu-RC_Group_51_RoHS_L_5.pdf, Datasheet Version="Rev. 5, 10/2016", Depth=0.8mm, Height=0.45mm, Lead Free=LeadFree, Length=1.6mm, Manufacturer URL=http://www.yageo.com/, Military Standard=Not, Number of Pins=2, Package Reference=0603, Packaging=TapeandReel, Radiation Hardening=No, REACH SVHC=NoSVHC, RoHSCompliant=true, Termination=SMD/SMT, Voltage Rating (DC)=50V, Width=0.8mm
R301 R302 R303 R304 R305 R306: library part Resistor, "generic", Manufacturer="Yageo / Phycomp", Part Number=RC0402FR-0747KL
R505 R508: library part RES-2, "Chip Resistor, 0 Ohm, +/- 5%, 0.1 W, -55 to 155 degC, 0603 (1608 Metric), RoHS, Tape and Reel", Case Code (Imperial)=0603, Case Code (Metric)=1608, Manufacturer=Yageo, Max Operating Temperature=155degC, Min Operating Temperature=-55degC, Package Description="2-Pin Surface Mount Device, Body 1.6 x 0.8 mm", Package Quantity=5000, Power Rating=100mW, Resistance=1K, Temperature Coefficient=200ppm/degreesC, Tolerance=5%, Voltage Rating=50V, Case/Package=0603, Composition=ThickFilm, Contact Plating=Tin, Datasheet URL=http://www.yageo.com/NewPortal/yageodocoutput?fileName=/pdf/R-Chip/PYu-RC_Group_51_RoHS_L_5.pdf, Datasheet Version="Rev. 5, 10/2016", Depth=0.8mm, Height=0.45mm, Lead Free=LeadFree, Length=1.6mm, Manufacturer URL=http://www.yageo.com/, Military Standard=Not, Number of Pins=2, Package Reference=0603, Packaging=TapeandReel, Radiation Hardening=No, REACH SVHC=NoSVHC, RoHSCompliant=true, Termination=SMD/SMT, Voltage Rating (DC)=50V, Width=0.8mm
R506: library part RES-2, "Chip Resistor, 0 Ohm, +/- 5%, 0.1 W, -55 to 155 degC, 0603 (1608 Metric), RoHS, Tape and Reel", Case Code (Imperial)=0603, Case Code (Metric)=1608, Manufacturer=Yageo, Max Operating Temperature=155degC, Min Operating Temperature=-55degC, Package Description="2-Pin Surface Mount Device, Body 1.6 x 0.8 mm", Package Quantity=5000, Power Rating=100mW, Resistance=6K, Temperature Coefficient=200ppm/degreesC, Tolerance=5%, Voltage Rating=50V, Case/Package=0603, Composition=ThickFilm, Contact Plating=Tin, Datasheet URL=http://www.yageo.com/NewPortal/yageodocoutput?fileName=/pdf/R-Chip/PYu-RC_Group_51_RoHS_L_5.pdf, Datasheet Version="Rev. 5, 10/2016", Depth=0.8mm, Height=0.45mm, Lead Free=LeadFree, Length=1.6mm, Manufacturer URL=http://www.yageo.com/, Military Standard=Not, Number of Pins=2, Package Reference=0603, Packaging=TapeandReel, Radiation Hardening=No, REACH SVHC=NoSVHC, RoHSCompliant=true, Termination=SMD/SMT, Voltage Rating (DC)=50V, Width=0.8mm
R507: library part RES-2, "Chip Resistor, 0 Ohm, +/- 5%, 0.1 W, -55 to 155 degC, 0603 (1608 Metric), RoHS, Tape and Reel", Case Code (Imperial)=0603, Case Code (Metric)=1608, Manufacturer=Yageo, Max Operating Temperature=155degC, Min Operating Temperature=-55degC, Package Description="2-Pin Surface Mount Device, Body 1.6 x 0.8 mm", Package Quantity=5000, Power Rating=100mW, Resistance=13K, Temperature Coefficient=200ppm/degreesC, Tolerance=5%, Voltage Rating=50V, Case/Package=0603, Composition=ThickFilm, Contact Plating=Tin, Datasheet URL=http://www.yageo.com/NewPortal/yageodocoutput?fileName=/pdf/R-Chip/PYu-RC_Group_51_RoHS_L_5.pdf, Datasheet Version="Rev. 5, 10/2016", Depth=0.8mm, Height=0.45mm, Lead Free=LeadFree, Length=1.6mm, Manufacturer URL=http://www.yageo.com/, Military Standard=Not, Number of Pins=2, Package Reference=0603, Packaging=TapeandReel, Radiation Hardening=No, REACH SVHC=NoSVHC, RoHSCompliant=true, Termination=SMD/SMT, Voltage Rating (DC)=50V, Width=0.8mm
RS51: library part CRM2512AFX-10R0ELF, "Res Thick Film 2512 10 Ohm 1% 2W ±100ppm/°C Molded SMD SMD Paper T/R", Manufacturer=Bourns, Mouser Part Number=652-CRM2512AFX10R0LF, Supplier Part Number=2824741, Arrow Part Number=CRM2512AFX-10R0ELF, Arrow Price/Stock=https://www.arrow.com/en/products/crm2512afx-10r0elf/bourns, Category="Chip SMD Resistors", ComponentLink1Description=http://www.farnell.com/datasheets/2552937.pdf?src-supplier=Farnell, ComponentLink1URL=http://www.farnell.com/datasheets/2552937.pdf?src-supplier=Farnell, ComponentLink2Description=http://www.farnell.com/datasheets/2552937.pdf?src-supplier=Newark, ComponentLink2URL=http://www.farnell.com/datasheets/2552937.pdf?src-supplier=Newark, ComponentLink3Description=http://www.bourns.com/docs/product-datasheets/crm-a.pdf?src-supplier=Digi-Key, ComponentLink3URL=http://www.bourns.com/docs/product-datasheets/crm-a.pdf?src-supplier=Digi-Key, ComponentLink4Description=https://www.bourns.com/docs/product-datasheets/crm-a.pdf?src-supplier=Digi-Key, ComponentLink4URL=https://www.bourns.com/docs/product-datasheets/crm-a.pdf?src-supplier=Digi-Key, ComponentLink5Description=https://datasheet.octopart.com/CRM2512AFX-10R0ELF-Bourns-datasheet-99878395.pdf?src-supplier=Master+Electronics, ComponentLink5URL=https://datasheet.octopart.com/CRM2512AFX-10R0ELF-Bourns-datasheet-99878395.pdf?src-supplier=Master+Electronics, ComponentLink6Description=https://datasheet.ciiva.com/6550/crm-6550127.pdf?src-supplier=Digi-Key, ComponentLink6URL=https://datasheet.ciiva.com/6550/crm-6550127.pdf?src-supplier=Digi-Key, ComponentLink7Description=https://datasheet.ciiva.com/9122/crm-9122397.pdf?src-supplier=Avnet, ComponentLink7URL=https://datasheet.ciiva.com/9122/crm-9122397.pdf?src-supplier=Avnet, Datasheet Link=http://www.bourns.com/data/global/pdfs/CRM0805_1206_2010.pdf, Height=0.8mm, Manufacturer Part Number=CRM2512AFX-10R0ELF, Manufacturer_Name=Bourns, Manufacturer_Part_Number=CRM2512AFX-10R0ELF, Mouser Price/Stock=https://www.mouser.co.uk/ProductDetail/Bourns/CRM2512AFX-10R0ELF?qs=wd5RIQLrsJh9GcgTtlCG0w%3D%3D, Pricing="10=0,395, 100=0,312, 500=0,244, 1000=0,209, 2000=0,202 (EUR)", RoHS=No, Stock=3780, Supplier=Farnell, Supplier 1=Farnell, Supplier Part Number 1=2824741
U21: library part CMP-0313-00724-2, "8 Channel Data Acquisition System with 16-Bit, Bipolar Input, Simultaneous Sampling Analog-to-Digital Converter with Parallel, Serial and SPI Interface, 200KSPS, -40 to +85 degC, ST-64-2, Pb-Free, Tray", Generic Part Number=AD7606, Manufacturer="Analog Devices", Supplier Part Number=584-AD7606BSTZ, Category="Analog to Digital Converters (ADCs)", Channels=8, Code_JEDEC=MS-026-BCD, ComponentLink1Description="Manufacturer URL", ComponentLink1URL=http://www.analog.com/en/index.html, ComponentLink2Description=Datasheet, ComponentLink2URL=http://www.analog.com/static/imported-files/data_sheets/AD7606_7606-6_7606-4.pdf, ComponentLink3Description="Package Specification", ComponentLink3URL=http://www.analog.com/static/imported-files/packages/PKG_PDF/LQFP%28ST%29/ST_64_2.pdf, ComponentLink4Description="Product URL", ComponentLink4URL=http://www.analog.com/en/analog-to-digital-converters/ad-converters/ad7606/products/product.html, ComponentLink5Description=https://datasheet.ciiva.com/1143/1595896-1143555.pdf?src-supplier=Element14, ComponentLink5URL=https://datasheet.ciiva.com/1143/1595896-1143555.pdf?src-supplier=Element14, ComponentLink6Description=https://datasheet.ciiva.com/3037/ad7606-7606-6-7606-4-3037717.pdf?src-supplier=Avnet, ComponentLink6URL=https://datasheet.ciiva.com/3037/ad7606-7606-6-7606-4-3037717.pdf?src-supplier=Avnet, DatasheetVersion=Rev.C, Interface="Par, Ser, SPI", Manufacturer Part Number=AD7606BSTZ, Mounting Technology="Surface Mount", PackageDescription="64-Lead Low Profile Quad Flat Package [LQFP]", PackageReference=ST-64-2, PackageVersion=051706-A, Packing=Tray, PartNumber=AD7606BSTZ, Pricing="1=39,63, 10=37, 50=32,25, 100=31,46, 1000=31,46, 10000=31,46 (USD)", Resolution (Bits)=16, RoHS=Y, Stock=2011, Supplier=Mouser, Throughput Rate (SPS)=200K
U31: library part CMP-0284-00076-1, "LF-2.7 GHz RF/IF Gain and Phase Detector, 60ns Response Time, RU-14, Pb-Free, 96 Tube", RF Frequency (MHz)=2700, Supply Current=19mA, Temp Stability (dB)=1dB, Voltage Supply (V)="2.7 to 5.5", Code_JEDEC=MO-153AB-1, ComponentLink1Description="Manufacturer URL", ComponentLink1URL=www.analog.com, ComponentLink2Description=Datasheet, ComponentLink2URL=http://www.analog.com/static/imported-files/data_sheets/AD8302.pdf, ComponentLink3Description="Package Specification", ComponentLink3URL=http://www.analog.com/static/imported-files/packages/36057385283879153717235186773RU14.pdf, DatasheetVersion="Rev. A", Dynamic Range (dB)=60dB, PackageDescription="14-Lead Thin Shrink Small Outline Package [TSSOP]", PackageReference=RU-14, PackageVersion=Aug-2002, Product Description="Dual-Channel Gain and Phase Outputs", Response Time (ns typ)=60ns
U51: library part ADI-AD80XX-5, "Single Channel Very Low Noise Operational Amplifier, 400 MHz BW, 4 KV/us SR, Industrial, 5-pin SOT23 (RJ-5), Reel", Amplifiers Per Package=1, Generic Part Number=AD8014, Input Bias Current=5uA, Input Offset Voltage=2mV, Manufacturer="Analog Devices", PartNumber=AD8014ARTZ-REEL7, Code_JEDEC=MO-178-AA, ComponentLink1Description="Manufacturer URL", ComponentLink1URL=http://www.analog.com/en/index.html, ComponentLink2Description=Datasheet, ComponentLink2URL=http://www.analog.com/static/imported-files/data_sheets/AD8014.pdf, ComponentLink3Description="Package Specification", ComponentLink3URL=http://www.analog.com/static/imported-files/packages/PKG_PDF/SOT-23(RJ)/RJ_5.pdf, DatasheetVersion="Rev. C", Iq/Amp=1.3mA, Mounting Technology="Surface Mount", PackageDescription="5-Pin Small Outline Transistor Package, Body 2.9 x 1.6 mm, Pitch 0.95 mm", PackageReference=RJ-5, PackageVersion=121608-A, RevisionNote="Symbol corrected, Pin 2 orientation reversed", Slew Rate=4KV/us, Small Signal Bandwidth=400MHz, V Span Max=12V, V Span Min=4.5V
U61 U62: library part ADI-ADG725-SU-48, "1.8 to 5.5 V / +/-2.5 V, 4 Ohm, Serially Controlled, 16-Channel Analog Multiplexer, -40 to 85 degC, 48-pin QFP (SU-48), Tray", Manufacturer="Analog Devices", Bandwidth (Hz)=34M, Code_JEDEC=MS-026ABC, ComponentLink1Description="Manufacturer URL", ComponentLink1URL=http://www.analog.com/en/index.html, ComponentLink2Description=Datasheet, ComponentLink2URL=http://www.analog.com/static/imported-files/data_sheets/ADG725_731.pdf, ComponentLink3Description="Package Specification", ComponentLink3URL=http://www.analog.com/static/imported-files/packages/470644706845302410119987SU48_7x7.pdf, DatasheetVersion="Rev. A", Max Analog Signal Range="Vss to Vdd", Mounting Technology="Surface Mount", PackageDescription="48-Pin Thin Plastic Quad Flat Package, Body 7 x 7 mm, Pitch 0.5 mm", PackageReference=SU-48, Packing=Tray, PartNumber=ADG725BSUZ, Ron (ohms)=4, Supply V Guar Performance="Dual_(+/-2.5V), Single_(+3V), Single_(+5V)", t transition (s)=42n
Y51: "Crystal or Oscillator", Manufacturer_Name=ABRACON, Mouser Part Number=815-ASFLMB-25-XY-T, Arrow Part Number=ASFLMB-25.000MHZ-XY-T, Arrow Price/Stock=https://www.arrow.com/en/products/asflmb-25.000mhz-xy-t/abracon, Datasheet Link=https://abracon.com/Oscillators/ASFLMB.pdf, Height=0.9mm, Manufacturer_Part_Number=ASFLMB-25.000MHZ-XY-T, Mouser Price/Stock=https://www.mouser.co.uk/ProductDetail/ABRACON/ASFLMB-25.000MHZ-XY-T?qs=CnD89xF1VSmONT2LProkzQ%3D%3D

## Via types
v1: diameter 0.6, hole 0.3, Top Copper to Bottom Copper, tented both sides, 307 vias

## Nets (pads, with @x,y where several pads share a name; then routed paths per layer and width w, separated by ;. In a path a pad name is that pad's centre, name@x,y a point inside that pad or via, vN(x,y) a via of type N, cw(c..) or ccw(c..) an arc to the next point about the centre after c; other vN are vias at no path point)
3V3: C505.2 J11.17 Y51.4 | length 53.4
  Top Copper w0.381: J11.17@33.16,53.46 35.82,50.8 71.928,50.8 74.814,47.914 ; Y51.4@76.17,44.6 76.17,45.659 75.947,45.883 75.338,45.883 74.814,46.407 74.814,47.914 ; C505.2@79.52,46.7 79.5,46.7 78.286,47.914 74.814,47.914
5V: C401.1 J11.2 J11.4 Q41.3 | length 12.8
  Top Copper w0.381: J11.2@12.84,56 13.054,55.786 13.054,54.975 13.908,54.122 ; J11.4@15.38,56 15.38,55.88 14.5,55 14.5,54.714 13.908,54.122 ; Q41.3@17,47.427 17,47.868 16.62,48.248 C401.1@16.62,49.5 16.6,49.5 16.531,49.569 16.531,49.589 13.908,52.212 13.908,54.122
ADC_BUSY: J11.15 U21.14 | length 28.6
  Top Copper w0.27: v1(44.1,39.7) 44.163,39.763 44.163,39.963 44.4,40.2 U21.14@44.4,41.25
  Bottom Copper w0.27: J11.15@30.62,53.46 31.68,52.4 33.9,52.4 34.425,52.925 34.425,53.725 35.2,54.5 38.7,54.5 39.3,53.9 39.3,52.9 44.156,48.044 44.156,40.738 44.1,40.682 v1(44.1,39.7)
ADC_CONV: J11.31 U21.9 U21.10 | length 18.3
  Top Copper w0.27: U21.10@46.4,41.25 46.4,40.62 46.82,40.2 46.9,40.2 ; v1(46.9,39.7) 46.9,40.2 ; U21.9@46.9,41.25 46.9,40.2
  Bottom Copper w0.27: v1(46.9,39.7) 47.5,40.3 47.5,50.02 J11.31@50.94,53.46
ADC_CS: J11.24 U21.13 | length 20.9
  Top Copper w0.27: v1(44.8,39.7) 44.8,39.789 44.9,39.889 U21.13@44.9,41.25
  Bottom Copper w0.27: J11.24@40.78,56 40.447,56 40.087,55.64 40.047,55.64 39.703,55.296 39.703,53.151 39.768,53.086 39.768,53.041 40.361,52.448 40.406,52.448 44.8,48.054 44.8,46.607 44.562,46.369 44.562,45.903 44.8,45.665 v1(44.8,39.7)
ADC_RESET: J11.29 U21.11 | length 17
  Top Copper w0.27: U21.11@45.9,41.25 45.9,40.2 46.137,39.963 46.137,39.763 v1(46.2,39.7)
  Bottom Copper w0.27: v1(46.2,39.7) 46.2,39.789 46.062,39.927 46.062,39.961 45.8,40.223 45.8,45.391 46.146,45.736 46.146,46.531 45.7,46.976 45.7,50.76 J11.29@48.4,53.46
ADC_SCLK: J11.23 U21.12 | length 17.7
  Top Copper w0.27: U21.12@45.4,41.25 45.4,39.889 45.5,39.789 v1(45.5,39.7)
  Bottom Copper w0.27: J11.23@40.78,53.46 45.3,48.94 45.3,46.815 45.749,46.366 45.749,45.901 45.3,45.452 45.3,40.023 45.335,39.988 45.335,39.954 45.5,39.789 v1(45.5,39.7)
ADC_V4: P11.2 U21.55 | length 7.3
  Top Copper w0.27: U21.55@52.675,34.975 52.685,34.965 54.318,34.965 56.2,33.083 56.2,31.78 P11.2@57.4,30.58
ADC_V5: P11.4 U21.57 | length 5.4
  Top Copper w0.27: U21.57@52.675,35.975 54.045,35.975 56.82,33.2 56.9,33.2 P11.4@56.86,33.16
ADC_V6: P11.6 U21.59 | length 5.1
  Top Copper w0.27: U21.59@52.675,36.975 55.585,36.975 P11.6@57.15,35.41
ADC_V7: P11.8 U21.61 | length 4.8
  Top Copper w0.27: U21.61@52.675,37.975 54.631,37.975 54.896,38.24 P11.8@57.4,38.24
ADC_V8: P11.10 U21.63 | length 5.3
  Top Copper w0.27: U21.63@52.675,38.975 55.055,38.975 P11.10@57.11,41.03
AVCC: C205.1 U21.1 U21.37 U21.38 U21.48 | length 21.4
  Top Copper w0.27: U21.37@45.4,30.2 45.4,30.83 45.807,31.237 46.095,31.237 ; U21.38@45.9,30.2 45.9,31.042 46.095,31.237 ; U21.1@50.9,41.25 50.89,41.24 50.89,40.61 50.863,40.583 50.863,31.237 ; C205.1@51.4,27.46 51.4,29.07 50.9,29.57 U21.48@50.9,30.2 50.9,31.2 50.863,31.237 ; 46.095,31.237 50.863,31.237
CUR_SEN: IC52.1 U21.53 | length 29.3
  Top Copper w0.27: U21.53@52.675,33.975 v1(54.338,33.975) ; IC52.1@67.95,15.5 67.973,15.477 67.973,14.052 v1(67.996,14.029)
  Bottom Copper w0.27: v1(54.338,33.975) 55.325,33.975 55.6,33.7 55.6,29 67.4,17.2 67.4,14.625 v1(67.996,14.029)
DIN: J11.38 R503.1 U61.18 U62.18 | length 88.2
  Top Copper w0.27: U61.18@31.2,8.25 v1(32.5,8.25) ; U62.18@31.2,21.75 31.206,21.744 32.456,21.744 v1(32.5,21.7) ; v1(67.883,41.782) 67.947,41.845 68.495,41.845 69.25,42.6 R503.1@69.25,42.7
  Bottom Copper w0.27: v1(32.5,8.25) 32.545,8.25 33.062,8.767 33.062,9.438 32.838,9.662 32.838,12.333 34.056,13.551 34.056,15.744 33.659,16.141 33.659,20.597 v1@32.651,21.606 ; v1@32.651,21.7 v1(32.5,21.7) 32.538,21.738 33.433,21.738 34.295,22.6 35.105,22.6 54.889,42.384 54.889,56.3 55.601,57.012 57.548,57.012 J11.38@58.56,56 59.572,54.988 62.112,54.988 67.883,49.217 v1(67.883,41.782)
DOUTA: J11.19 U21.24 | length 23.1
  Top Copper w0.27: U21.24@41.625,35.975 41.635,35.985 42.596,35.985 42.811,36.2 v1(42.9,36.2)
  Bottom Copper w0.27: J11.19@35.7,53.46 36.729,52.431 38.646,52.431 43.103,47.974 43.103,41.792 43.362,41.533 43.362,41.067 43.141,40.846 43.141,36.53 42.9,36.289 v1(42.9,36.2)
DOUTB: J11.21 U21.25 | length 23.3
  Top Copper w0.27: U21.25@41.625,35.475 41.635,35.465 42.546,35.465 42.811,35.2 v1(42.9,35.2)
  Bottom Copper w0.27: J11.21@38.24,53.46 38.24,53.399 43.759,47.88 43.759,40.903 43.538,40.682 43.538,36.657 44.062,36.133 44.062,35.467 43.733,35.138 42.962,35.138 v1(42.9,35.2)
EXT_N_IN: J13.1 P12.2 R106.1 | length 15.3
  Top Copper w0.27: P12.2@7.803,47.885 7.803,47.737 7.025,46.959 7.025,42 7.025,39.086 11.355,34.756 R106.1@11.355,34.656
EXT_P_IN: J12.1 P12.1 R102.1 | length 20.6
  Top Copper w0.27: P12.1@5.263,47.885 3.933,46.554 3.933,39.136 4.091,38.978 4.809,38.978 7.024,36.763 J12.1@7.024,34.818 9.293,34.818 11.355,32.756 R102.1@11.355,32.656
FSYNC: J11.36 R501.1 | length 27.6
  Top Copper w0.27: v1(67.9,37.7) 67.963,37.763 68.512,37.763 69.267,38.518 R501.1@69.267,38.618
  Bottom Copper w0.27: J11.36@56.02,56 57.429,54.591 61.809,54.591 67.3,49.1 67.3,38.402 67.735,37.967 67.735,37.954 67.9,37.789 v1(67.9,37.7)